# Altium PCB CanCom_PCB.PcbDoc
Units mil, origin at the board's own origin, x right, y up, seen from the top; angles counter-clockwise.
Board outline 3220 x 2665 mil, 2 copper layers (Top Layer, Bottom Layer); 6 components, 11 nets, 65 pads, 0 vias.
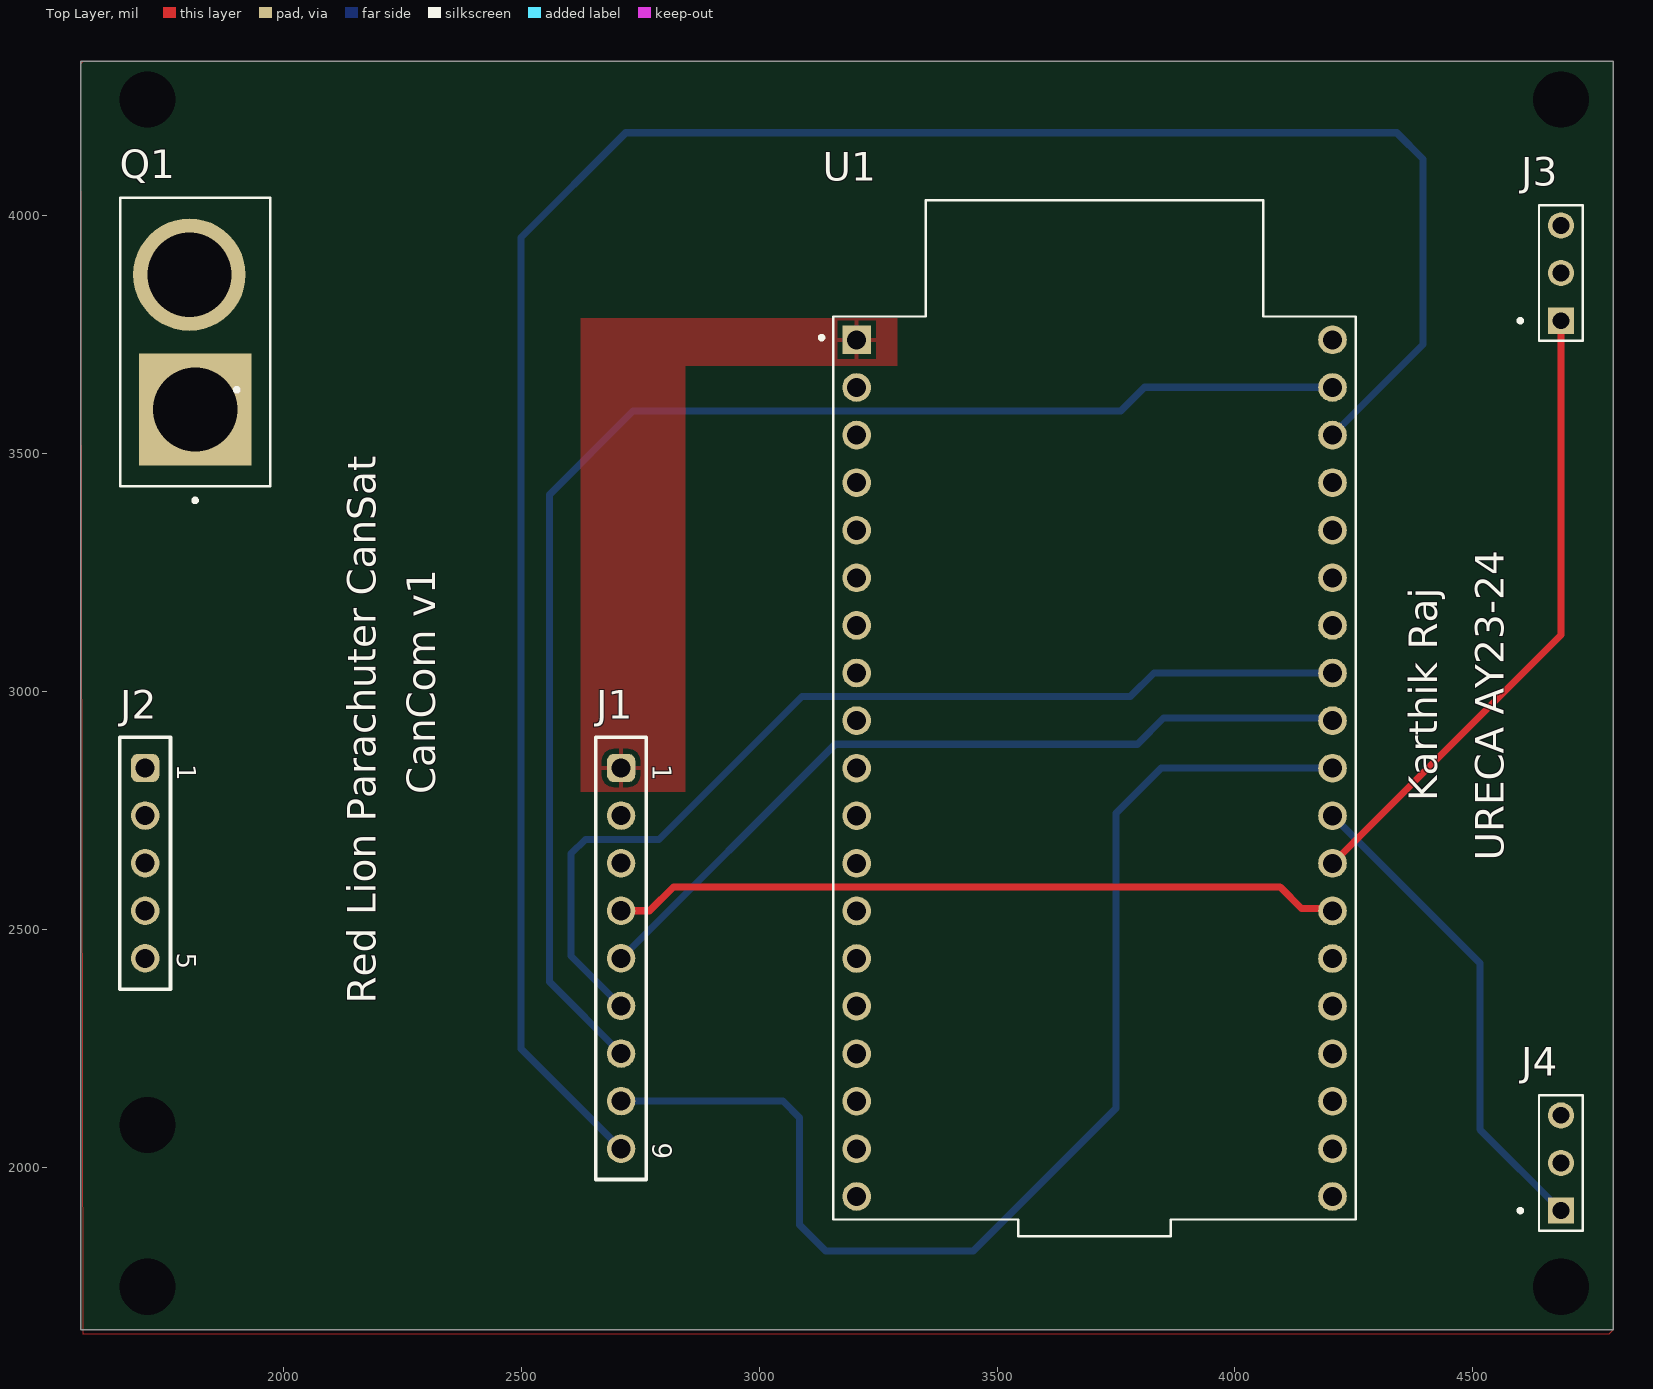
[diagram p0: Top Layer view]
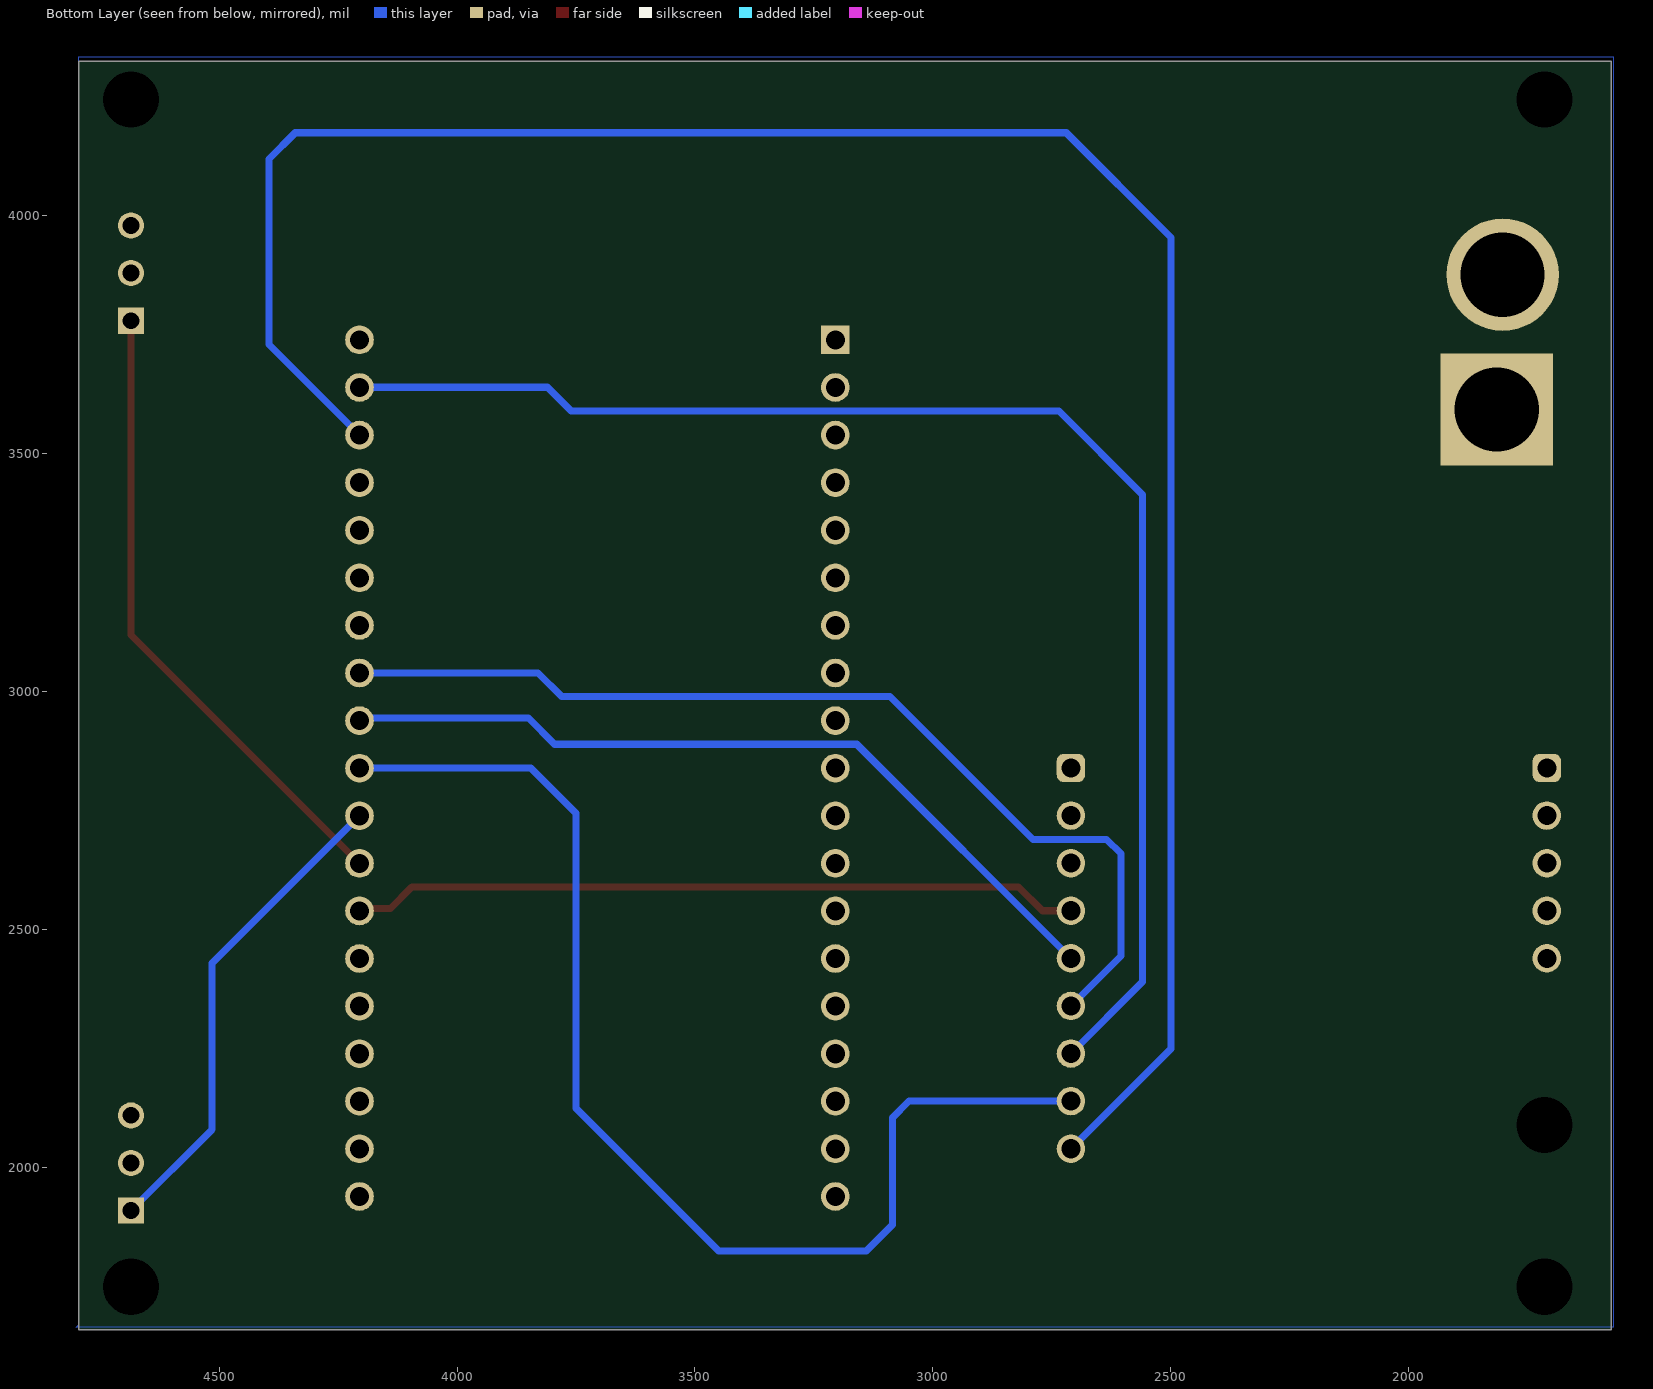
[diagram p1: Bottom Layer view, seen from below]
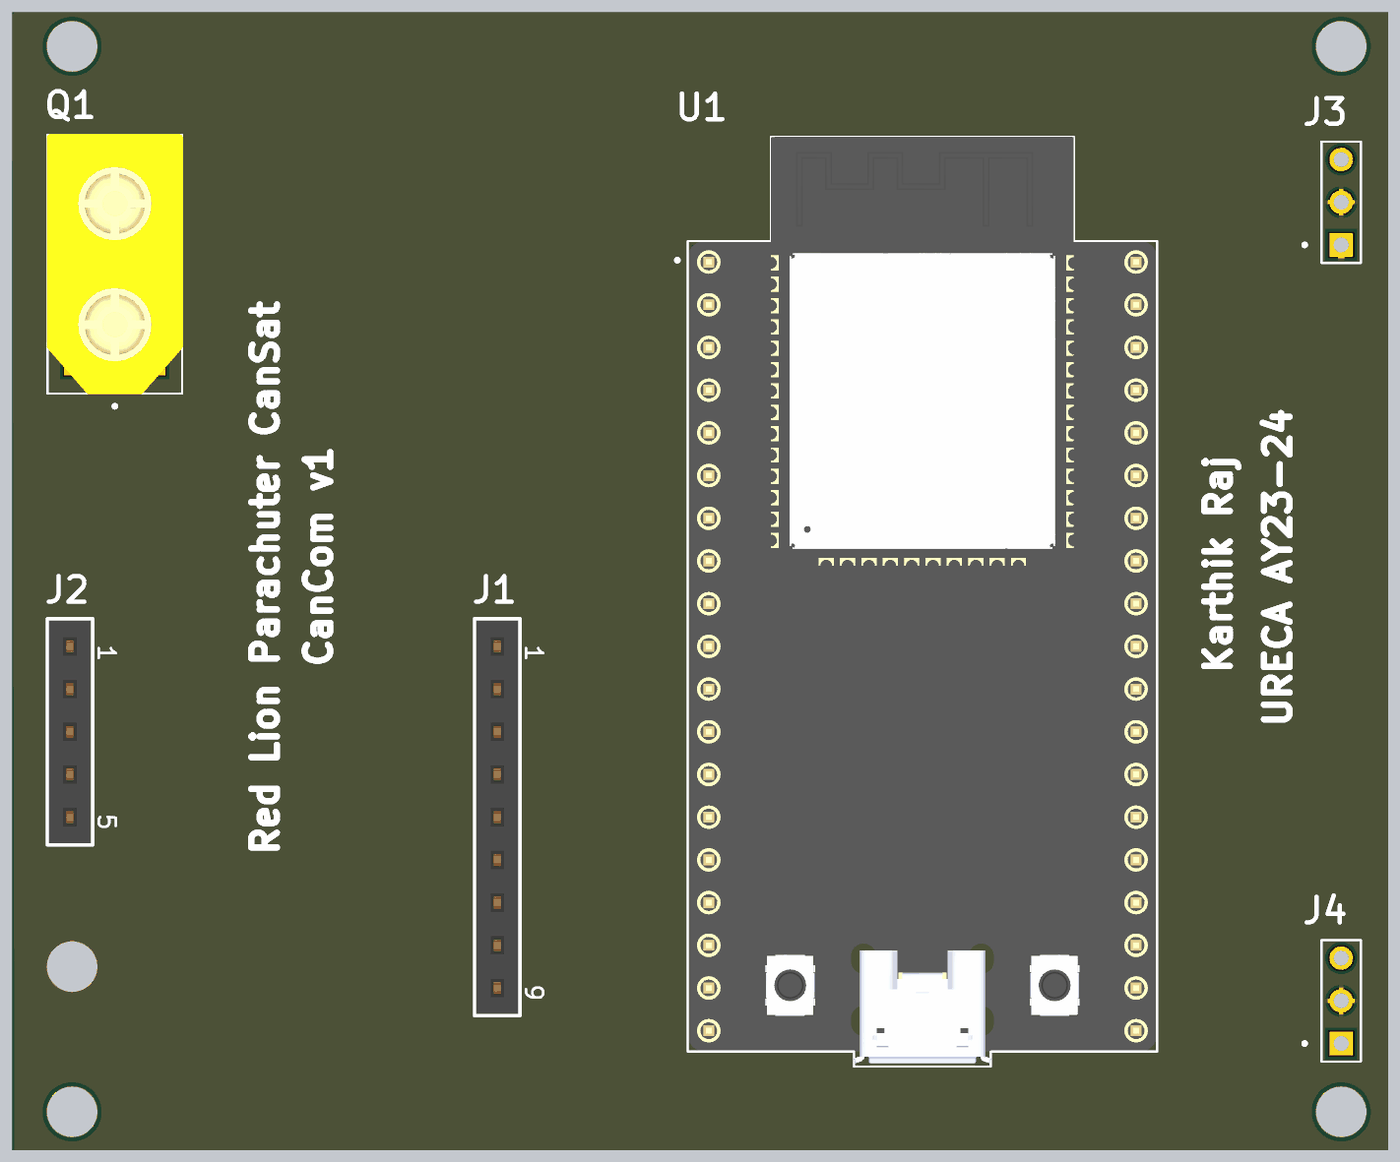
[diagram p2: 3D render of the assembled board from above, using the file's embedded part models]

## Layer stack, top to bottom
Top Solder: solder mask 0.4, Solder Resist, Dk 3.5
Top Layer: signal copper 1.4
Dielectric 1: dielectric 12.6, FR-4, Dk 4.8
Bottom Layer: signal copper 1.4
Bottom Solder: solder mask 0.4, Solder Resist, Dk 3.5

## Board outline
1575,1660 4795,1660 4795,4325 1575,4325

## Design rules (kind name [scope] priority, off if disabled: settings)
Clearance [All] p1: gap=10 ignorepadtopadclearanceinfootprint=FALSE except(0: Arc-Hole Track-Hole SMDPad-Hole THPad-Hole Via-Hole Fill-Hole Poly-Hole Region-Hole Text-Hole)
PolygonConnect [All] p1: connectstyle=Relief reliefconductorwidth=10 reliefentries=4 polygonreliefangle="90 Angle" airgapwidth=10
RoutingVias [All] p1: holewidth=28 width=50 viastyle="Through Hole" minholewidth=28 minwidth=50 maxholewidth=28 maxwidth=50
SolderMaskExpansion [All] p1: expansion=4 istentingtop=FALSE
Width MaxMinWidth_1 [All] p1: maxlimit=35 minlimit=10 preferedwidth=15 minimp=50.000000 maximp=50.000000 favimp=50.000000
Width [All] p2: maxlimit=10 minlimit=10 preferedwidth=10
30 further rules are at their usual default settings.

## Components (designator, comment, footprint, x,y, rotation, side; value= is the part's Value field where it differs from the comment)
J1 "LoRa_1" 61300911821 2710,2440 r270 top
J2 "LoRa_1" 61300511821 1710,2640 r270 top
J3 "Servo_1" TE_87220-3 4685,3880 r90 top
J4 "Servo_2" TE_87220-3 4685,2010 r90 top
Q1 "XT60" AMASS_XT60PB-M 1815,3735 r90 top
U1 "ESP32-DEVKITC" MODULE_ESP32-DEVKITC 3705,2840 r0 top

## Footprints (in the part's own frame and the unit in brackets; to place one, negate y for a bottom-side part, rotate by r counter-clockwise, add the part's x,y. Pads: shape width x height; smd on the part's side, far side on the other; paste and mask are expansions set on the pad)
61300511821 [mm] "Socket Header, Pitch 2.54 mm, THT, Vertical, single row, 5p"
  rrect50% 1.52x1.52 hole 1.02: 1(-5.08,0)
  round 1.52 hole 1.02: 2(-2.54,0) 3(0,0) 4(2.54,0) 5(5.08,0)
  silkscreen extent -6.73,-1.35 6.73,1.35, body extent -6.6,-1.25 6.6,1.25, height 8.55
61300911821 [mm] "Socket Header, Pitch 2.54 mm, THT, Vertical, single row, 9p"
  rrect50% 1.52x1.52 hole 1.02: 1(-10.16,0)
  round 1.52 hole 1.02: 2(-7.62,0) 3(-5.08,0) 4(-2.54,0) 5(0,0) 6(2.54,0) 7(5.08,0) 8(7.62,0) 9(10.16,0)
  silkscreen extent -11.81,-1.35 11.81,1.35, body extent -11.68,-1.25 11.68,1.25, height 8.55
AMASS_XT60PB-M [mm]
  rect 6x6 / inner round 6 / far side rect 6x6 hole 4.5: 1(-3.6,0)
  round 6 hole 4.5: 2(3.6,0.305)
  silkscreen extent -8.55,-4 7.7,4, body extent -7.75,-4.05 7.75,4.05, height 16
MODULE_ESP32-DEVKITC [mm]
  rect 1.53x1.53 / inner round 1.53 / far side rect 1.53x1.53 hole 1.02: 1(-12.7,22.85)
  round 1.53 hole 1.02: 2(-12.7,20.31) 3(-12.7,17.77) 4(-12.7,15.23) 5(-12.7,12.69) 6(-12.7,10.15) 7(-12.7,7.61) 8(-12.7,5.07) 9(-12.7,2.53) 10(-12.7,-0.01) 11(-12.7,-2.55) 12(-12.7,-5.09) 13(-12.7,-7.63) 14(-12.7,-10.17) 15(-12.7,-12.71) 16(-12.7,-15.25) 17(-12.7,-17.79) 18(-12.7,-20.33) 19(-12.7,-22.87) 20(12.7,-22.87) 21(12.7,-20.33) 22(12.7,-17.79) 23(12.7,-15.25) 24(12.7,-12.71) 25(12.7,-10.17) 26(12.7,-7.63) 27(12.7,-5.09) 28(12.7,-2.55) 29(12.7,-0.01) 30(12.7,2.53) 31(12.7,5.07) 32(12.7,7.61) 33(12.7,10.15) 34(12.7,12.69) 35(12.7,15.23) 36(12.7,17.77) 37(12.7,20.31) 38(12.7,22.85)
  silkscreen extent -14.67,-25 13.95,30.3, body extent -13.97,-24.8 13.97,30.3, height 3.25
TE_87220-3 [mm]
  rect 1.398x1.398 hole 0.89: 1(-2.54,0)
  round 1.398 hole 0.89: 2(0,0) 3(2.54,0)
  silkscreen extent -3.61,-1.17 3.61,2.27

## Part data
J1: library part CMP-1502-01331-2, Contact Resistance=20mΩ, Current Rating=3A, Operating Supply Voltage=250V, Gender=Female, Lead Pitch=2.54mm, NexarPartId=61924727, Number of Pins=9, Orientation=Vertical, RoHS=Non-Compliant
J2: library part CMP-1502-01320-2, Contact Resistance=20mΩ, Current Rating=3A, Operating Supply Voltage=250V, Gender=Female, Lead Pitch=2.54mm, NexarPartId=61924716, Number of Pins=5, Orientation=Vertical, RoHS=Non-Compliant
J3 J4: library part CMP-002-00071-1, "Header; Standard; PC Board; Single; 3; 0.025 in.; 0.125 in.; Square; 0.1 in.", Case/Package=None, Centerline_Pitch="2.54 mm[.1 in]", Component Type=Standard, Design Item ID=87220-3, Digi-Key_Part_Number=A26544-ND, Digi-Key_Purchase_URL=https://www.digikey.com/product-detail/en/te-connectivity-amp-connectors/87220-3/A26544-ND/298245?utm_source=snapeda&utm_medium=aggregator&utm_campaign=symbol, EU_RoHS_Compliance=Compliant, MF="TE Connectivity", MP=87220-3, Number_of_Positions=3, Pins=3, Product_Type=Connector, SnapEDA_Link=https://www.snapeda.com/parts/87220-3/TE%20Connectivity%20AMP%20Connectors/view-part/499136/?ref=snap, Source=SnapEDAsch.SchLib, TE_purchase_URL=https://www.te.com/usa-en/product-87220-3.html?te_bu=Cor&te_type=disp&te_campaign=seda_glo_cor-seda-global-disp-prtnr-fy19-seda-model-bom-cta_sma-317_1&elqCampaignId=32493
Q1: library part CMP-019-000000-1, "Power connector; 65A; PIN: 2; Colour: yellow", Package=None, Availability="Not in stock", Check_prices=https://www.snapeda.com/parts/XT60%20YELLOW/Pololu/view-part/?ref=eda, Component Type=Standard, Design Item ID=XT60_YELLOW, MF=Pololu, MP="XT60 YELLOW", Pin Count=2, Price=None, SnapEDA_Link=https://www.snapeda.com/parts/XT60%20YELLOW/Pololu/view-part/?ref=snap, Source=XT60_YELLOW.SchLib
U1: library part CMP-017-000000-1, "ESP32-WROOM-32UE series Transceiver; 802.11 b/g/n (Wi-Fi, WiFi, WLAN), Bluetooth Â® Smart Ready 4.x Dual Mode Evaluation Board", Package=None, Availability="In Stock", Check_prices=https://www.snapeda.com/parts/ESP32-DEVKITC/Espressif+Systems/view-part/?ref=eda, Component Type=Standard, Design Item ID=ESP32-DEVKITC, MF="Espressif Systems", MP=ESP32-DEVKITC, Pin Count=38, Price=None, Purchase-URL=https://pricing.snapeda.com/search/part/ESP32-DEVKITC/?ref=eda, SnapEDA_Link=https://www.snapeda.com/parts/ESP32-DEVKITC/Espressif+Systems/view-part/?ref=snap, Source=ESP32-DEVKITC.SchLib

## Free pads (board coordinates)
  round 10 hole 118.11: 6(1715,1750) 6(1715,2090) 6(1715,4245) 6(4685,1750) 6(4685,4245)

## Nets (pads, with @x,y where several pads share a name; then routed paths per layer and width w, separated by ;. In a path a pad name is that pad's centre, name@x,y a point inside that pad or via, vN(x,y) a via of type N, cw(c..) or ccw(c..) an arc to the next point about the centre after c; other vN are vias at no path point)
+V_Bat: J3.2 J4.2 Q1.2 U1.19
GND: J1.2 J3.3 J4.3 Q1.1 U1.14 U1.32 U1.38
NetJ1_1: J1.1 U1.1
NetJ1_4: J1.4 U1.26 | length 1536.6
  Top Layer w15: J1.4 2770,2540 2820,2590 4095,2590 4140,2545 4199.61,2545 U1.26
NetJ1_5: J1.5 U1.30 | length 1706.4
  Bottom Layer w15: J1.5 3160,2890 3795,2890 3850,2945 4199.61,2945 U1.30
NetJ1_6: J1.6 U1.31 | length 2120.7
  Bottom Layer w15: J1.6 2605,2445 2605,2660 2635,2690 2790,2690 3090,2990 3780,2990 3829.61,3039.61 U1.31
NetJ1_7: J1.7 U1.37 | length 2975.5
  Bottom Layer w15: J1.7 2560,2390 2560,3415 2735,3590 3760,3590 3810,3640 4204.61,3640 U1.37
NetJ1_8: J1.8 U1.29 | length 2540.7
  Bottom Layer w15: J1.8 3050,2140 3085,2105 3085,1880 3140,1825 3450,1825 3750,2125 3750,2745 3844.61,2839.61 U1.29
NetJ1_9: J1.9 U1.36 | length 4670
  Bottom Layer w15: J1.9 2500,2250 2500,3955 2720,4175 4340,4175 4395,4120 4395,3729.61 U1.36
NetJ3_1: J3.1 U1.27 | length 1339.2
  Top Layer w15: U1.27 4685,3119.61 J3.1
NetJ4_1: J4.1 U1.28 | length 1028.4
  Bottom Layer w15: U1.28 4515,2429.61 4515,2080 J4.1
pads on no net: J1.3 J2.1 J2.2 J2.3 J2.4 J2.5 U1.2 U1.3 U1.4 U1.5 U1.6 U1.7 U1.8 U1.9 U1.10 U1.11 U1.12 U1.13 U1.15 U1.16 U1.17 U1.18 U1.20 U1.21 U1.22 U1.23 U1.24 U1.25 U1.33 U1.34 U1.35

## Polygon pours and split planes (outlines as drawn)
NetJ1_1 on Top Layer "NETJ1_1_L01_P002" (solid, pour order 2): 2845,3685 3290,3685 3290,3785 2625,3785 2625,2790 2845,2790
+V_Bat on Top Layer "NONET_L01_P000" (solid, shelved, pour order 0): 1575,4320 1580,4325 4795,4325 4795,1660 4785,1650 1580,1650
GND on Bottom Layer "NONET_L02_P001" (solid, shelved, pour order 1): 4795,4335 1570,4335 1570,1665 4800,1665 4795,1670

## Silkscreen, mask and mechanical layers (free items; w line width, h text height)
Top Overlay:
  text "CanCom v1" at 2320,2785 h60 r90
  text "Karthik Raj" at 4425,2770 h60 r90
  text "URECA AY23-24" at 4565,2645 h60 r90
  text "Red Lion Parachuter CanSat" at 2195,2345 h60 r90

## Text inside footprints (layer, text, board x,y; h text height)
J1: Top Overlay "9" at 2776.93,2052.2 h40 r270; Top Overlay "1" at 2776.93,2847.48 h40 r270
J2: Top Overlay "5" at 1776.93,2452.2 h40 r270; Top Overlay "1" at 1776.93,2847.48 h40 r270